# Altium PCB PCB1.PcbDoc
Units mm, origin at the board's own origin, x right, y up, seen from the top; angles counter-clockwise.
Board outline 129.67 x 73.28 mm, 2 copper layers (Top Layer, Bottom Layer); 25 components, 36 nets, 131 pads, 12 vias.
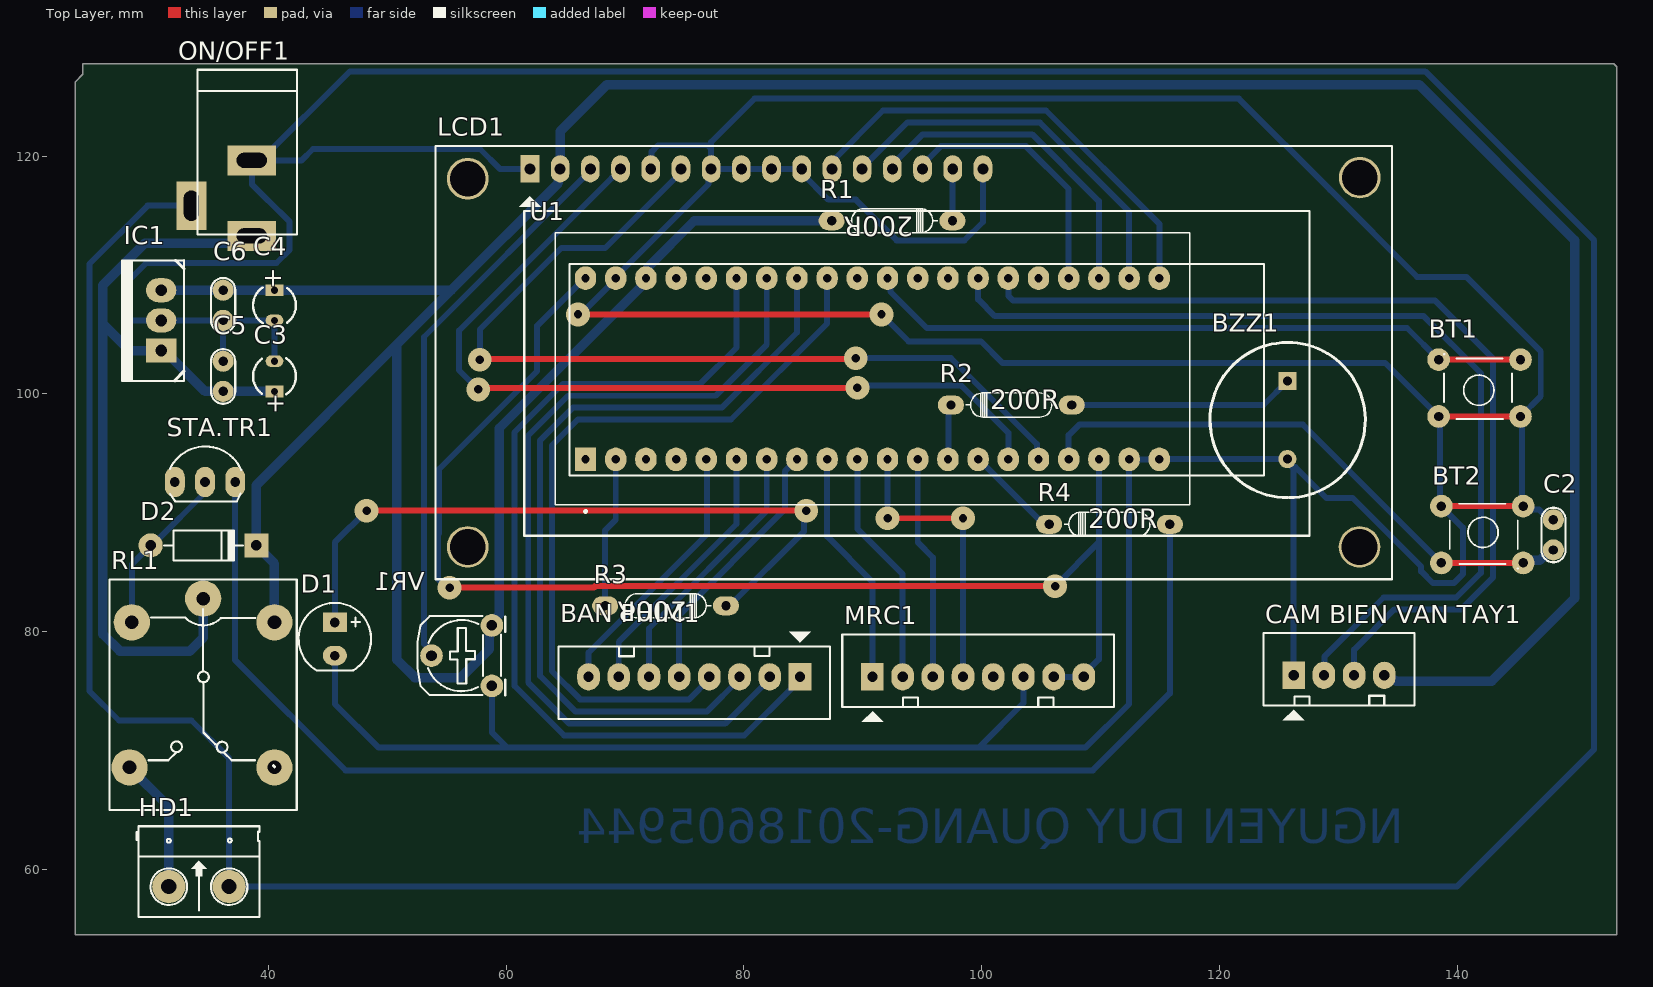
[diagram p0: Top Layer view]
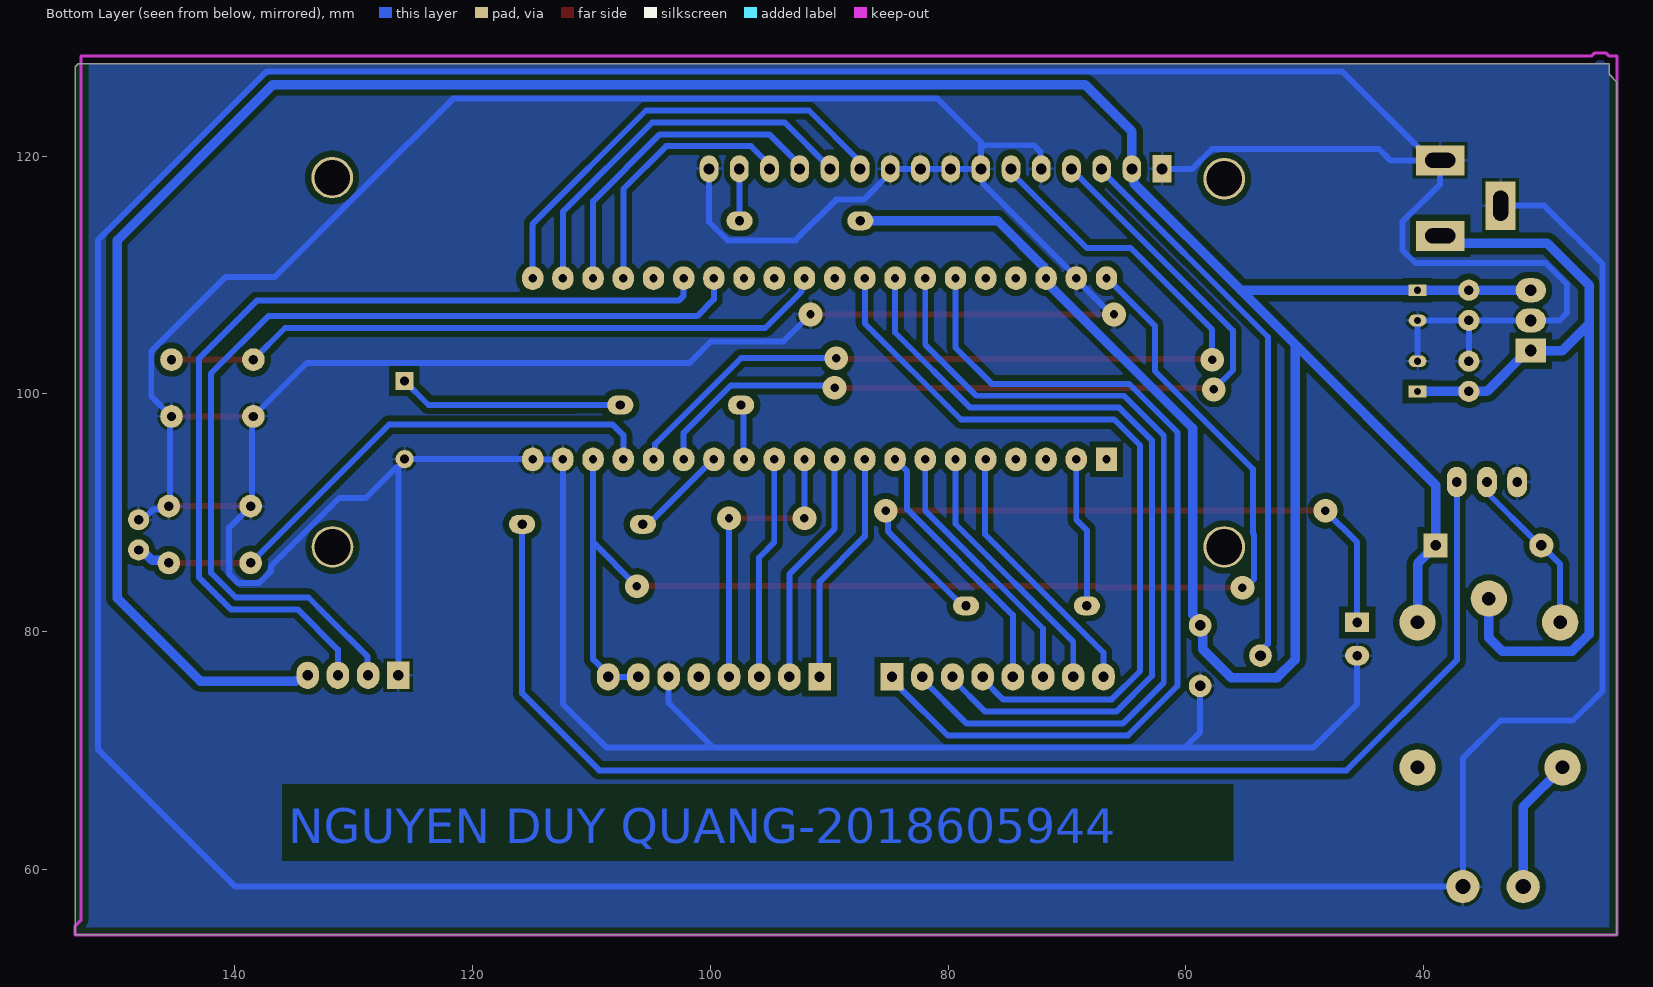
[diagram p1: Bottom Layer view, seen from below]
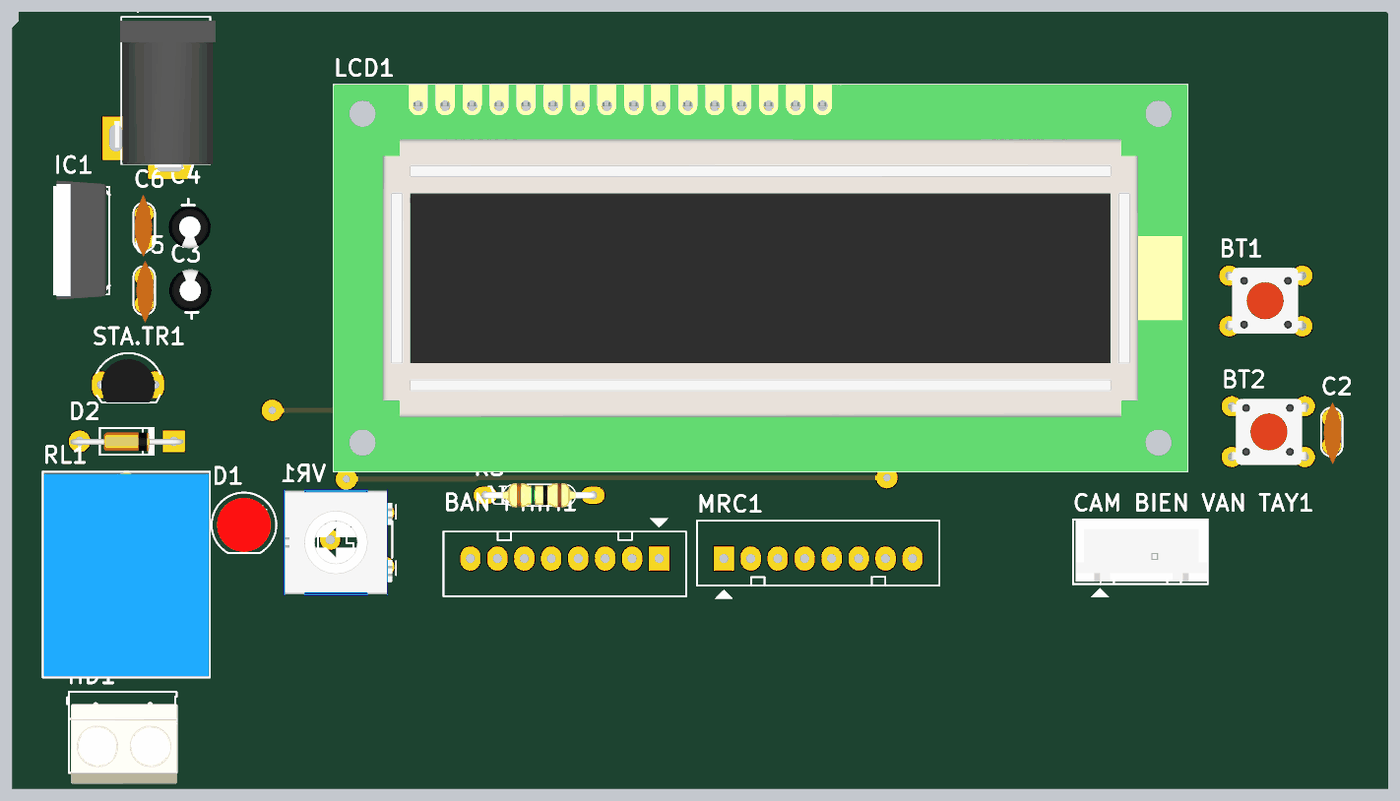
[diagram p2: 3D render of the assembled board from above, using the file's embedded part models]

## Layer stack, top to bottom
Top Solder: solder mask 0.0102, Solder Resist, Dk 3.5
Top Layer: signal copper 0.0356
Dielectric 1: dielectric 0.32, FR-4, Dk 4.8
Bottom Layer: signal copper 0.0356
Bottom Solder: solder mask 0.0102, Solder Resist, Dk 3.5

## Board outline
23.749,54.483 23.749,126.238 24.384,126.873 24.384,127.762 153.162,127.762 153.416,127.508 153.416,54.483

## Design rules (kind name [scope] priority, off if disabled: settings)
Clearance [All] p1: gap=0.5 ignorepadtopadclearanceinfootprint=FALSE
PolygonConnect [All] p1: connectstyle=Relief reliefconductorwidth=0.254 reliefentries=4 polygonreliefangle="90 Angle" airgapwidth=0.254
RoomDefinition Sheet1 [InComponentClass('Sheet1')] p1: confinementstyle=ConfineIn formatcopy=TRUE lockcomponents=FALSE outline 0,0 50.8,0 50.8,25.4 0,25.4
RoutingVias [All] p1: holewidth=0.711 width=2 viastyle="Through Hole" minholewidth=0.711 minwidth=1.27 maxholewidth=0.711 maxwidth=4
SolderMaskExpansion [All] p1: expansion=0.102 istentingtop=FALSE
Width [All] p1: maxlimit=0.8 minlimit=0.5 preferedwidth=0.5
30 further rules are at their usual default settings.

## Components (designator, comment, footprint, x,y, rotation, side; value= is the part's Value field where it differs from the comment)
"BAN PHIM1" "JP8" CON8 84.709,76.2 r180 top value="Connector 8"
BT1 "BT" SW4 144.983,97.892 r180 top
BT2 "BT" SW4 138.989,90.754 r0 top
BZZ1 "Buzzer" "buzzer 5V" 125.73,97.79 r270 top
C2 "CAP gom" CN1 148.082,89.408 r270 top
C3 "Cap Pol" C3MM 40.513,101.473 r90 top
C4 "Cap Pol" C3MM 40.513,107.442 r270 top
C5 "CAP gom" CN1 36.195,102.743 r270 top
C6 "CAP gom" CN1 36.195,106.172 r90 top
"CAM BIEN VAN TAY1" "JP4" CON4 126.238,76.327 r0 top value="Connector 4"
D1 "Photo Diode" LED-5 45.593,79.375 r270 top
D2 "1N4007" D1A 30.099,87.249 r180 top
HD1 "Header 2" HED2 31.623,58.547 r0 top
IC1 "LM7805" QTO-220 30.988,103.632 r90 top
LCD1 "LCD 16x2A" LCD16X2 62.001,118.923 r0 top value=LCD16x2A
MRC1 "JP8" CON8 90.805,76.2 r0 top value="Connector 8"
ON/OFF1 "POWER" DC-IN 36.068,116.459 r270 top
R1 "330" "DIEN TRO 1/4 W" 97.536,114.554 r180 top value=R
R2 "100" "DIEN TRO 1/4 W" 97.409,99.06 r0 top value=R
R3 "100" "DIEN TRO 1/4 W" 78.486,82.169 r180 top value=R
R4 "330" "DIEN TRO 1/4 W" 105.664,89.027 r0 top value=R
RL1 "Relay" RL_SPDT_10A 34.513,82.78 r270 top value="Relay SPDT, 10A, 12V"
STA.TR1 "TR815" QTO-92 34.671,92.583 r0 top value=C1815
U1 "ZC323000" MODULE_ZC323000 90.805,102.108 r90 top
VR1 "10K" VR 58.801,80.518 r270 top value="VR 10K"

## Footprints (in the part's own frame and the unit in brackets; to place one, negate y for a bottom-side part, rotate by r counter-clockwise, add the part's x,y. Pads: shape width x height; smd on the part's side, far side on the other; paste and mask are expansions set on the pad)
"buzzer 5V" [mil]
  rect 60x60 hole 30: 1(-130,0)
  round 60 hole 30: 2(129,-1)
  silkscreen extent -257,-257 257,257, body extent -236,-236 236,236, height 345
C3MM [mm]
  rect 1x1.5 hole 0.6: 1(-1.27,0)
  oval 1x1.5 hole 0.6: 2(1.27,0)
  silkscreen extent -1.5,-1.81 1.5,1.8, body extent -2,-2.03 1.99,1.97, height 7.01
CN1 [mil]
  round 70 hole 31: 1(0,0) 2(100,0)
  silkscreen extent -40,-40 141,40, body extent -60,-30 170,37, height 265
CON4 [mil] "CON4"
  rect 75x90 hole 34: 1(0,0)
  oval 75x90 hole 34: 2(100,0) 3(200,0) 4(300,0)
  silkscreen extent -100,-150 400,140, body extent -90,-90 398,136, height 276
CON8 [mil] "CON8"
  rect 75x90 hole 34: 1(0,0)
  oval 75x90 hole 34: 2(100,0) 3(200,0) 4(300,0) 5(400,0) 6(500,0) 7(600,0) 8(700,0)
  silkscreen extent -100,-150 800,140
D1A [mil] "Diode 1A, W 100mil, L 350mil"
  round 80 hole 35: 1(0,0)
  rect 80x80 hole 35: 2(-350,0)
  silkscreen extent -305,-50 -45,50, body extent -386,-33 34,36, height 84
DC-IN [mil] "Jac DC input"
  rect 100x160 hole 50 slot 100 at 90 deg: 1(125,100) 2(-125,100)
  rect 160x100 hole 50 slot 100 at 0 deg: 3(25,-100)
  silkscreen extent -425,-80 120,250, body extent -410,-105 134,269, height 434
"DIEN TRO 1/4 W" [mm]
  oval 2.2x1.6 hole 0.787: 1(0,0) 2(10.16,0)
  silkscreen extent 1.26,-1.02 8.88,1.02, body extent -0.3,-1.16 10.46,1.16, height 2.93
HED2 [mil] "Header 2, 2 pin, hight 300mil, Pin to Pin 200, Colour Green"
  round 110 hole 50: 1(0,0) 2(200,0)
  silkscreen extent -106,-100 300,200, body extent -92,-140 302,155, height 394
LCD16X2 [mil] "LCD dipslay 16x2, 16 pin"
  rect 62x90 hole 36: 1(0,0)
  oval 62x90 hole 36: 2(100,0) 3(200,0) 4(300,0) 5(400,0) 6(500,0) 7(600,0) 8(700,0) 9(800,0) 10(900,0) 11(1000,0) 12(1100,0) 13(1200,0) 14(1300,0) 15(1400,0) 16(1500,0)
  round 137.8 hole 118.11: "Hole 0"(-206,-1252) "Hole 0"(-206,-33) "Hole 0"(2747,-1252) "Hole 0"(2748,-29)
  silkscreen extent -313,-1359 2854,76, body extent -315,-1360 2855,77, height 729
LED-5 [mil] "LED 2 PIN, 5 ly , Only colour, pin to pin 110mil"
  rect 65x80 hole 32: 1(-55,0)
  oval 65x80 hole 32: 2(55,0)
  silkscreen extent -120,-120 104,120, body extent -100,-100 100,100, height 339
MODULE_ZC323000 [mm]
  rect 2x1.8 hole 0.7: 1(-7.62,24.13)
  oval 2x1.8 hole 0.7: 2(-7.62,21.59) 3(-7.62,19.05) 4(-7.62,16.51) 5(-7.62,13.97) 6(-7.62,11.43) 7(-7.62,8.89) 8(-7.62,6.35) 9(-7.62,3.81) 10(-7.62,1.27) 11(-7.62,-1.27) 12(-7.62,-3.81) 13(-7.62,-6.35) 14(-7.62,-8.89) 15(-7.62,-11.43) 16(-7.62,-13.97) 17(-7.62,-16.51) 18(-7.62,-19.05) 19(-7.62,-21.59) 20(-7.62,-24.13) 21(7.62,-24.13) 22(7.62,-21.59) 23(7.62,-19.05) 24(7.62,-16.51) 25(7.62,-13.97) 26(7.62,-11.43) 27(7.62,-8.89) 28(7.62,-6.35) 29(7.62,-3.81) 30(7.62,-1.27) 31(7.62,1.27) 32(7.62,3.81) 33(7.62,6.35) 34(7.62,8.89) 35(7.62,11.43) 36(7.62,13.97) 37(7.62,16.51) 38(7.62,19.05) 39(7.62,21.59) 40(7.62,24.13)
  silkscreen extent -12.1,-26.67 11.43,26.67
QTO-92 [mil] "TO-92"
  oval 66x100 hole 32: 1(-100,0) 2(0,0) 3(100,0)
  silkscreen extent -117,-65 120,118, body extent -109,-66 109,95, height 245
QTO-220 [mil] "TO-220 - 1-2-3"
  rect 80x100 hole 39: 1(0,0)
  oval 80x100 hole 39: 2(100,0) 3(200,0)
  silkscreen extent -100,-76 300,130, body extent -119,-64 322,121, height 905
RL_SPDT_10A [mil] "Relay SPDT, 5 pin, 10A,W 650mil, L 800mil, H 800mil"
  round 120 hole 45: 1(0,0) 2(559.06,236.22) 3(559.06,-243.78) 4(78.74,-236.22) 5(78.74,236.22)
  silkscreen extent -63,-311 700,310, body extent -55,-306 697,304, height 602
SW4 [mil] "SW button 4pin, 250 x250 mil"
  round 75 hole 31: 1(-13,-8) 1(258,-8) 2(-13,-196) 2(258,-196)
  silkscreen extent 15,-215 240,0, body extent -31,-225 281,19, height 276
VR [mil] "Resistor Variable"
  round 75 hole 35: 1(0,0) 2(100,-200) 3(200,0)
  silkscreen extent -31,-246 231,44, body extent -87,-372 307,30, height 220

## Part data
"BAN PHIM1" MRC1: library part Con8, "Connector 8"
BT1 BT2: library part BUTTON
C3 C4: "Polarized Capacitor (Axial)", LatestRevisionDate=17-Jul-2002, LatestRevisionNote="Re-released for DXP Platform.", PackageReference=POLAR0.8, Published=8-Jun-2000, Publisher="Altium Limited"
"CAM BIEN VAN TAY1": library part Con4, "Connector 4"
D1: "Photosensitive Diode"
D2: library part D1A, "Diode 1A"
HD1: library part Hed2, "Header 2 (Green)"
IC1: library part LM78xx, "On ap +, from + 5 to + 24VDC"
LCD1: library part LCD16x2A, "LCD dipslay 16 char, 2 line"
ON/OFF1: library part DCIN
R1 R2 R3 R4: library part "Res 1/4 W", "Resistor", LatestRevisionDate=17-Jul-2002, LatestRevisionNote="Re-released for DXP Platform.", PackageReference=AXIAL-0.4, Published=8-Jun-2000, Publisher="Altium Limited"
RL1: library part "Relay SRD", "Relay SPDT 5 Pin"
STA.TR1: library part C1815, "NPN 600mW, ECB"
U1: "STM32F103C8T6 ARM STM32 Minimum System Development Board Module For Arduino", Package=None, Availability=Unavailable, MF=YKS, MP=ZC323000, Price=None, SnapEDA_Link=https://www.snapeda.com/parts/ZC323000/YKS/view-part/725364/?ref=snap
VR1: library part VR, "Var Resistor"

## Via types
v1: diameter 2, hole 0.711, Top Layer to Bottom Layer, 12 vias

## Nets (pads, with @x,y where several pads share a name; then routed paths per layer and width w, separated by ;. In a path a pad name is that pad's centre, name@x,y a point inside that pad or via, vN(x,y) a via of type N, cw(c..) or ccw(c..) an arc to the next point about the centre after c; other vN are vias at no path point)
+5: "CAM BIEN VAN TAY1.4" C4.1 C6.2 D2.2 IC1.3 LCD1.2 R1.2 RL1.5 U1.38 VR1.1 | length 309.1
  Bottom Layer w0.8: IC1.3 C6.2 C4.1 55.372,108.712 ; RL1.5 40.513,85.725 D2.2 38.989,92.329 50.8,104.14 ; R1.2 75.819,114.554 71.946,110.681 71.946,109.628 59.419,97.101 59.419,81.435 59.012,81.028 59.012,80.729 58.59,80.307 58.59,78.529 56.186,76.125 52.319,76.125 50.8,77.644 50.8,104.14 ; 133.858,76.327 134.26,75.925 134.793,75.925 134.879,75.839 142.895,75.839 149.88,82.824 149.88,112.908 136.813,125.975 68.444,125.975 64.541,122.072 LCD1.2 64.393,118.775 64.393,117.733 55.372,108.712 ; 50.8,104.14 55.372,108.712
+12: C3.1 C5.2 IC1.1 ON/OFF1.1 RL1.1 | length 73.2
  Bottom Layer w0.8: RL1.1 34.513,79.471 33.398,78.356 27.509,78.356 26.089,79.776 26.089,105.864 ; ON/OFF1.1 37.973,112.649 29.591,112.649 26.089,109.147 26.089,105.864 ; C3.1 C5.2 34.671,100.203 31.242,103.632 IC1.1 28.321,103.632 26.089,105.864
COL1: "BAN PHIM1.4" U1.32 | length 65.3
  Bottom Layer w0.5: 77.089,76.2 77.089,76.01 75.387,74.307 66.224,74.307 63.855,76.676 63.855,95.668 66.025,97.838 78.915,97.838 86.995,105.918 U1.32
COL2: "BAN PHIM1.3" U1.33 | length 69.1
  Bottom Layer w0.5: 79.629,76.2 79.629,76.01 76.882,73.263 65.854,73.263 62.855,76.262 62.855,96.082 65.611,98.838 78.137,98.838 84.455,105.156 U1.33
COL3: "BAN PHIM1.2" U1.34 | length 73.1
  Bottom Layer w0.5: U1.34 81.915,104.14 77.613,99.838 65.197,99.838 61.855,96.496 61.855,75.703 65.295,72.263 78.422,72.263 82.169,76.01 82.169,76.2
COL4: "BAN PHIM1.1" U1.35 | length 76.7
  Bottom Layer w0.5: U1.35 79.375,103.886 76.327,100.838 64.783,100.838 60.706,96.761 60.706,75.438 64.881,71.263 80.026,71.263 84.006,75.243 84.006,75.497 84.709,76.2
D4: LCD1.11 U1.21 | length 38.4
  Bottom Layer w0.5: LCD1.11 87.401,119.532 91.694,123.825 105.41,123.825 114.935,114.3 U1.21
D5: LCD1.12 U1.22 | length 32.8
  Bottom Layer w0.5: LCD1.12 89.941,119.024 93.742,122.825 104.886,122.825 112.395,115.316 U1.22
D6: LCD1.13 U1.23 | length 27.6
  Bottom Layer w0.5: LCD1.13 92.481,119.278 95.028,121.825 104.235,121.825 109.855,116.205 U1.23
D7: LCD1.14 U1.24 | length 22.3
  Bottom Layer w0.5: LCD1.14 95.021,119.278 96.568,120.825 103.711,120.825 107.315,117.221 U1.24
E: LCD1.6 U1.16 | length 76.5
  Top Layer w0.5: v1(57.785,102.87) 57.848,102.933 89.344,102.933 v1(89.408,102.997)
  Bottom Layer w0.5: v1(57.785,102.87) 57.785,105.41 64.643,112.268 68.326,112.268 74.701,118.643 LCD1.6 ; v1(89.408,102.997) 97.409,102.997 104.63,95.776 104.63,94.633 U1.16
GND: "CAM BIEN VAN TAY1.1" BT1.1 BT2.1 BZZ1.2 C2.1 C3.2 C4.2 C5.1 C6.1 D1.2 HD1.2 IC1.2 LCD1.1 LCD1.5 LCD1.7 LCD1.8 LCD1.9 LCD1.10 LCD1.16 MRC1.6 ON/OFF1.2 ON/OFF1.3 STA.TR1.1 U1.19 U1.20 U1.39 VR1.3 | length 841.3
  Top Layer w0.5: v1(66.04,106.68) v1(91.567,106.68) ; BT1.1@138.43,98.095 BT1.1@145.313,98.095 ; BT2.1@138.659,90.551 BT2.1@145.542,90.551
  Bottom Layer w0.5: ON/OFF1.3 29.845,115.824 24.939,110.918 24.939,75.01 27.432,72.517 33.528,72.517 36.703,69.342 HD1.2 139.954,58.547 151.511,70.104 151.511,112.903 137.289,127.125 46.861,127.125 ON/OFF1.2@39.37,119.634 ; C5.1 C6.1 ; C3.2@40.763,102.743 C3.2 C4.2 C6.1 ; D1.2 45.593,73.914 49.244,70.263 60.071,70.263 ; VR1.3 58.801,71.533 60.071,70.263 ; LCD1.1 59.466,118.923 57.805,120.585 43.75,120.585 42.799,119.634 ON/OFF1.2@39.37,119.634 ; v1(66.04,106.68) 66.167,106.807 66.394,106.807 69.215,109.628 U1.39 69.215,109.828 77.036,117.649 77.036,118.717 LCD1.7 ; LCD1.5 72.241,119.002 72.241,120.374 72.771,120.904 76.949,120.904 77.241,120.611 ; v1(91.567,106.68) 93.853,104.394 99.949,104.394 101.739,102.604 133.921,102.604 138.43,98.095 138.544,97.98 138.544,90.665 138.659,90.551 140.462,88.748 140.462,84.836 139.699,84.073 137.953,84.073 136.956,85.071 136.956,85.477 131.195,91.237 128.981,91.237 126.377,93.841 ; LCD1.16 100.101,114.452 98.552,112.903 92.837,112.903 89.408,116.332 87.097,116.332 84.861,118.567 LCD1.10 LCD1.9 LCD1.8 LCD1.7 ; MRC1.6 103.505,73.99 99.779,70.263 ; 126.238,76.327 126.238,93.703 125.705,94.236 BZZ1.2 125.692,94.501 114.948,94.501 U1.20 U1.19 112.395,73.914 108.744,70.263 99.779,70.263 ; C2.1 147.736,89.408 146.862,90.282 145.811,90.282 145.542,90.551 145.428,90.665 145.428,97.98 145.313,98.095 147.016,99.797 147.016,103.575 140.749,109.843 136.609,109.843 129.301,117.151 121.626,124.825 80.89,124.825 77.241,121.176 77.241,120.611 ; C6.1 28.575,106.172 27.954,106.793 27.954,109.234 29.718,110.998 40.685,110.998 41.783,112.096 41.783,114.472 40.015,116.239 39.983,116.239 38.608,117.614 ON/OFF1.2 ON/OFF1.2@39.37,119.634 ; 60.071,70.263 99.779,70.263 ; LCD1.7 77.241,120.611
khoa: R4.1 U1.14 | length 8.2
  Bottom Layer w0.5: U1.14 99.749,94.488 105.21,89.027 R4.1
MISO: MRC1.4 U1.11 | length 24.6
  Top Layer w0.5: v1(92.075,89.535) v1(98.425,89.535)
  Bottom Layer w0.5: v1(92.075,89.535) U1.11 ; MRC1.4 v1(98.425,89.535)
MOSI: MRC1.3 U1.12 | length 18.8
  Bottom Layer w0.5: U1.12 94.615,87.503 95.885,86.233 MRC1.3
NetBT1_2: BT1.2 U1.30 | length 56.6
  Top Layer w0.5: BT1.2@138.43,102.87 BT1.2@145.313,102.87
  Bottom Layer w0.5: U1.30 92.324,109.479 92.324,108.59 95.377,105.537 135.763,105.537 BT1.2@138.43,102.87
NetBT2_2: BT2.2 C2.2 U1.17 | length 48.4
  Top Layer w0.5: BT2.2@138.659,85.776 BT2.2@145.542,85.776
  Bottom Layer w0.5: U1.17 107.315,96.52 108.204,97.409 127.025,97.409 BT2.2@138.659,85.776
  Bottom Layer w0.8: BT2.2@145.542,85.776 145.753,85.987 146.937,85.987 147.817,86.868 C2.2
NetBZZ1_1: BZZ1.1 R2.2 | length 19.4
  Bottom Layer w0.5: R2.2 111.252,99.06 123.698,99.06 BZZ1.1 BZZ1.1@125.476,101.346
NetD1_1: D1.1 R3.1 | length 58.5
  Top Layer w0.5: v1(48.26,90.17) v1(85.245,90.17)
  Bottom Layer w0.5: D1.1 45.593,87.503 v1(48.26,90.17) ; R3.1 78.786,82.169 85.057,88.44 85.057,89.982 v1(85.245,90.17)
NetD2_1: D2.1 RL1.4 STA.TR1.2 | length 14.5
  Bottom Layer w0.5: RL1.4 28.513,85.663 D2.1 30.226,87.249 35.052,92.075 STA.TR1.2@35.052,92.456
NetHD1_1: HD1.1 RL1.3 | length 11.4
  Bottom Layer w0.8: RL1.3 31.623,65.278 HD1.1
NetLCD1_3: LCD1.3 VR1.2 | length 47
  Bottom Layer w0.5: VR1.2 53.721,78.338 53.086,78.973 53.086,104.775 67.081,118.77 LCD1.3
NetLCD1_15: LCD1.15 R1.1 | length 4.4
  Bottom Layer w0.5: R1.1 97.549,114.567 97.549,118.91 LCD1.15
NetR2_1: R2.1 U1.13 | length 4.7
  Bottom Layer w0.5: U1.13 97.218,94.551 97.218,98.87 R2.1
NetR3_2: R3.2 U1.2 | length 12.7
  Bottom Layer w0.5: R3.2 68.326,88.519 69.215,89.408 U1.2
NetR4_2: R4.2 STA.TR1.3 | length 114.3
  Bottom Layer w0.5: STA.TR1.3 37.211,77.597 46.482,68.326 109.347,68.326 115.824,74.803 R4.2
ROW1: "BAN PHIM1.8" U1.5 | length 22.5
  Bottom Layer w0.5: 66.929,76.2 66.929,78.232 76.907,88.21 76.907,94.416 U1.5
ROW2: "BAN PHIM1.7" U1.6 | length 22.4
  Bottom Layer w0.5: 69.469,76.2 69.469,79.138 79.375,89.044 U1.6
ROW3: "BAN PHIM1.6" U1.7 | length 22.4
  Bottom Layer w0.5: 72.009,76.2 72.009,80.264 81.915,90.17 U1.7
ROW4: "BAN PHIM1.5" U1.8 | length 22.4
  Bottom Layer w0.5: 74.549,76.2 74.549,81.39 83.439,90.28 83.439,93.472 U1.8
RS: LCD1.4 U1.15 | length 73.5
  Top Layer w0.5: v1(57.654,100.373) 57.759,100.479 89.518,100.479 v1(89.539,100.5)
  Bottom Layer w0.5: v1(57.654,100.373) 56.035,101.992 56.035,105.311 68.869,118.145 68.909,118.145 69.621,118.858 LCD1.4 ; v1(89.539,100.5) 89.75,100.711 98.25,100.711 98.351,100.61 102.235,96.726 U1.15
RST: MRC1.7 MRC1.8 U1.18 U1.40 | length 109.5
  Top Layer w0.5: v1(55.245,83.693) 67.358,83.693 67.485,83.82 v1(106.172,83.82)
  Bottom Layer w0.5: v1(55.245,83.693) 55.118,83.82 54.864,83.82 54.269,84.415 54.269,88.158 54.356,88.245 54.356,93.664 62.611,101.919 62.611,105.726 66.613,109.728 U1.40 ; MRC1.7 MRC1.8 108.585,76.391 109.855,77.66 109.855,87.503 ; v1@106.045,83.693 v1(106.172,83.82) 109.855,87.503 ; U1.18 109.855,87.503
RX: "CAM BIEN VAN TAY1.2" U1.27 | length 81.1
  Bottom Layer w0.5: U1.27 99.695,107.95 101.108,106.537 137.171,106.537 141.986,101.722 141.986,84.946 139.91,82.87 133.797,82.87 132.245,81.318 128.815,77.888 128.815,76.364 128.778,76.327
SCK: MRC1.2 U1.10 | length 19.9
  Bottom Layer w0.5: U1.10 89.535,88.646 93.345,84.836 MRC1.2
SDA: MRC1.1 U1.9 | length 19.9
  Bottom Layer w0.5: U1.9 86.995,88.011 90.805,84.201 MRC1.1
TX: "CAM BIEN VAN TAY1.3" U1.26 | length 79.2
  Bottom Layer w0.5: U1.26 102.235,108.243 102.643,107.834 138.138,107.834 142.986,102.987 142.986,84.532 140.324,81.87 134.702,81.87 131.318,78.486 131.318,76.327
pads on no net: "LCD1.Hole 0" MRC1.5 RL1.2 U1.1 U1.3 U1.4 U1.25 U1.28 U1.29 U1.31 U1.36 U1.37

## Polygon pours and split planes (outlines as drawn)
GND on Bottom Layer "GND_L02_P000" (solid, pour order 0): 23.749,54.864 153.035,54.864 153.035,128.27 23.749,128.27

## Keep-outs
Bottom Layer:
  lines w0.254: 153.416,54.483 152.654,54.483 24.892,54.483 23.749,54.483 23.749,126.238 23.749,128.397 24.384,128.397 24.638,128.651 25.654,128.651 25.908,128.397 152.908,128.397 152.908,55.753 153.416,55.245 153.416,54.483 ; 153.416,54.483 153.416,54.483 ; 153.416,54.483 153.416,54.483

## Other copper
Bottom Layer:
  text "NGUYEN DUY QUANG-2018605944" at 135.509,61.214 h5

## Text inside footprints (layer, text, board x,y; h text height)
C3: Top Overlay "+" at 41.275,98.298 h1.52 r90
C4: Top Overlay "+" at 39.751,110.617 h1.52 r270
R1: Top Overlay "200R" at 94.234,115.443 h2.8 r180
R2: Top Overlay "200R" at 100.711,98.171 h2.8
R3: Top Overlay "200R" at 75.184,83.058 h2.8 r180
R4: Top Overlay "200R" at 108.966,88.138 h2.8